# EAGLE board hvprog_05 (EAGLE 4.11)
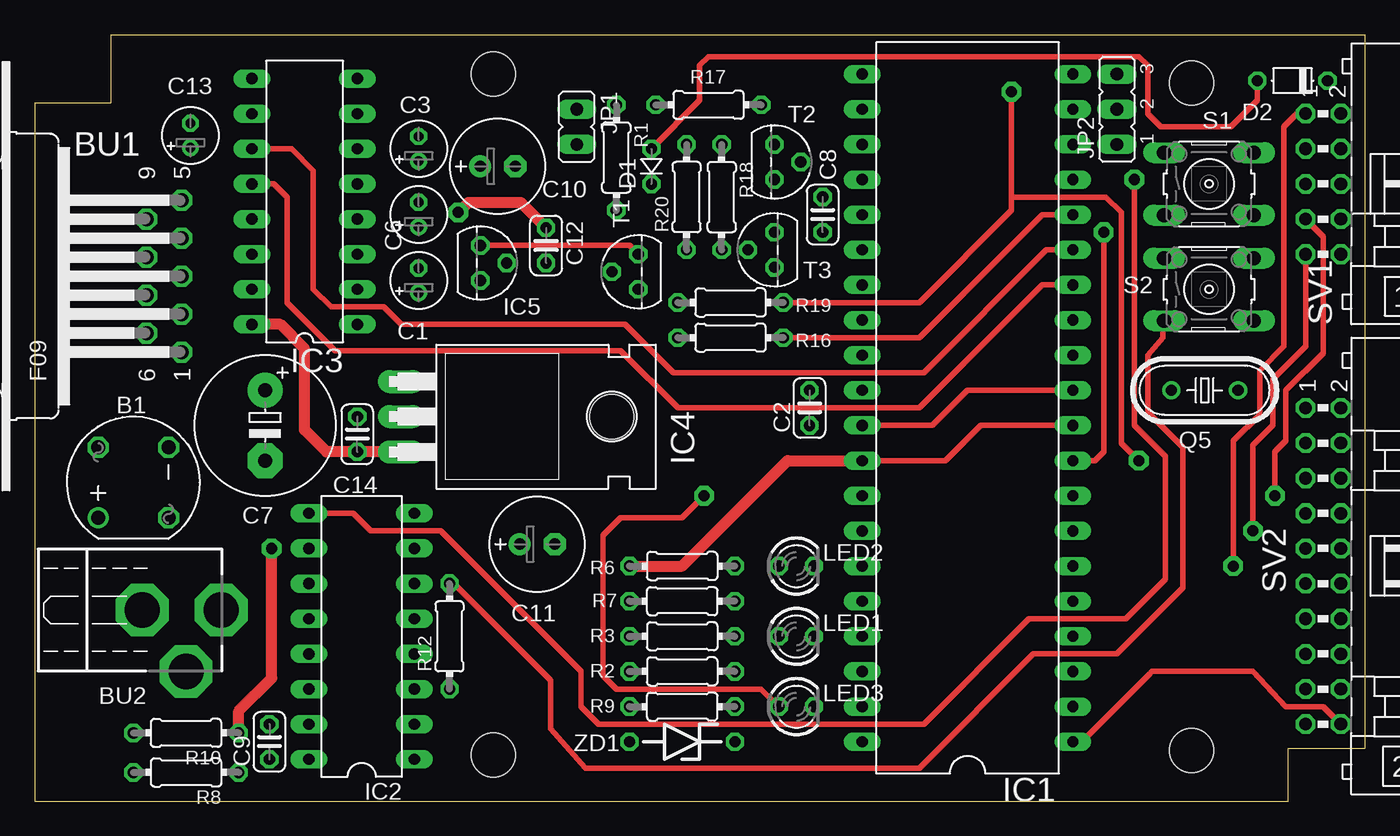
[diagram p0: board, top side]
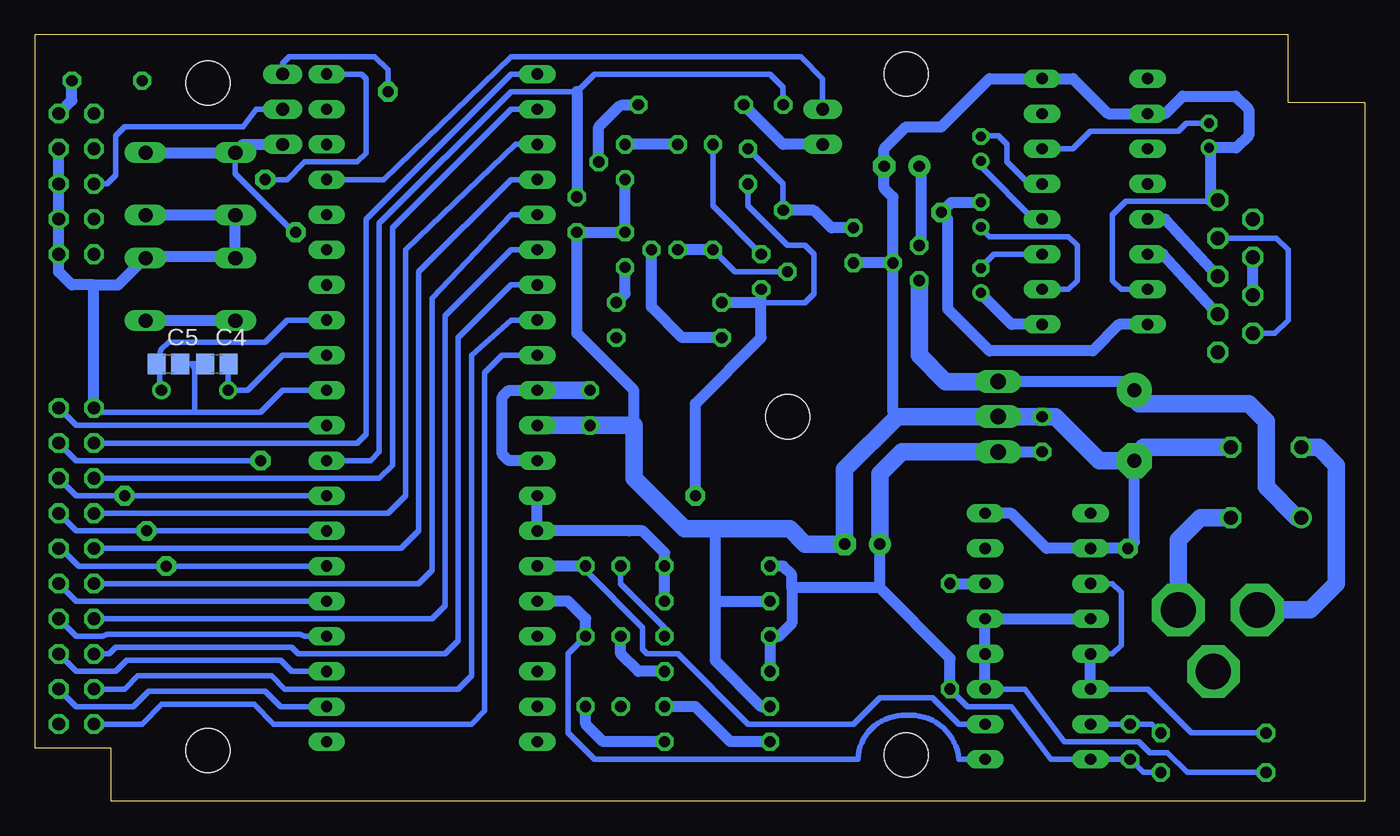
[diagram p1: board, bottom side, seen from below]

Size 96.2 x 55.4 mm. Coordinates in mm from the lower left corner, seen from the top.
Outline: 90.65,0 90.65,3.81 96.2,3.81 96.2,55.4 5.56,55.4 5.56,50.48 0,50.48 0,0 90.65,0
Copper layers (1*16): Top 0.035mm / dielectric 1.5mm / Bottom 0.035mm
Design rules "default": minimum track width 10mil, minimum drill 24mil, track to track 8mil, track to pad 8mil, pad to pad 8mil, via to via 8mil, smd to smd 8mil, copper to edge 40mil, drill to drill 8mil, minimum pad ring 10mil, minimum via ring 8mil, stop-mask expansion 4mil, vias tented up to drill 0mil, thermal gap 10mil
Holes 3.2 mm at 33.18,52.55 33.18,3.33 83.66,3.65 83.66,51.91 41.75,27.78

## Footprints (pad centres in the part's own frame; a part is rotated, then mirrored left to right if it is on the bottom)
RB1A = drill 1.016 round: + -2.54,2.54 | drill 1.016 octagon: - 2.54,-2.54; AC1 2.54,2.54; AC2 -2.54,-2.54
SUBD-F9 = drill 1.016 octagon: 1 -5.486,-10.16; 2 -2.743,-10.16; 3 0,-10.16; 4 2.743,-10.16; 5 5.486,-10.16; 6 -4.115,-7.62; 7 -1.372,-7.62; 8 1.372,-7.62; 9 4.115,-7.62
HEBW21 = drill 2.54 pad 3.81 octagon: P$R 0,3.175; P$RS 4.445,0.635; P$S 0,-2.54
E1,8-4 = drill 0.711 pad 1.168 round: + -0.889,0 | drill 0.711 pad 1.168 octagon: - 0.889,0
C025-024X044 = drill 0.813 octagon: 1 -1.27,0; 2 1.27,0
C0805 = smd 1.3 x 1.5: 1 -0.85,0; 2 0.85,0
E5-10,5 = drill 1.016 pad 2.54 round: + -2.54,0 | drill 1.016 pad 2.54 octagon: - 2.54,0
E2,5-7 = drill 0.813 pad 1.6 round: + -1.27,0 | drill 0.813 pad 1.6 octagon: - 1.27,0
D-2.5 = drill 0.813 octagon: A 1.27,0; C -1.27,0
D-5 = drill 0.813 octagon: A 2.54,0; C -2.54,0
DIL40 = drill 0.813 long: 1 -24.13,-7.62; 2 -21.59,-7.62; 3 -19.05,-7.62; 4 -16.51,-7.62; 5 -13.97,-7.62; 6 -11.43,-7.62; 7 -8.89,-7.62; 8 -6.35,-7.62; 9 -3.81,-7.62; 10 -1.27,-7.62; 11 1.27,-7.62; 12 3.81,-7.62; 13 6.35,-7.62; 14 8.89,-7.62; 15 11.43,-7.62; 16 13.97,-7.62; 17 16.51,-7.62; 18 19.05,-7.62; 19 21.59,-7.62; 20 24.13,-7.62; 21 24.13,7.62; 22 21.59,7.62; 23 19.05,7.62; 24 16.51,7.62; 25 13.97,7.62; 26 11.43,7.62; 27 8.89,7.62; 28 6.35,7.62; 29 3.81,7.62; 30 1.27,7.62; 31 -1.27,7.62; 32 -3.81,7.62; 33 -6.35,7.62; 34 -8.89,7.62; 35 -11.43,7.62; 36 -13.97,7.62; 37 -16.51,7.62; 38 -19.05,7.62; 39 -21.59,7.62; 40 -24.13,7.62
DIL16 = drill 0.813 long: 1 -8.89,-3.81; 2 -6.35,-3.81; 3 -3.81,-3.81; 4 -1.27,-3.81; 5 1.27,-3.81; 6 3.81,-3.81; 7 6.35,-3.81; 8 8.89,-3.81; 9 8.89,3.81; 10 6.35,3.81; 11 3.81,3.81; 12 1.27,3.81; 13 -1.27,3.81; 14 -3.81,3.81; 15 -6.35,3.81; 16 -8.89,3.81
TO220H = drill 1.118 long: 1 -2.54,-10.16; 2 0,-10.16; 3 2.54,-10.16
TO92 = drill 0.813 octagon: 1 -1.27,0; 2 0,1.905; 3 1.27,0
JP1 = drill 0.914 long: 1 0,-1.27; 2 0,1.27
JP2 = drill 0.914 long: 1 -2.54,0; 2 0,0; 3 2.54,0
LED3MM = drill 0.813 octagon: A -1.27,0; K 1.27,0
HC49U-V = drill 0.813 round: 1 -2.413,0; 2 2.413,0
0204/7 = drill 0.813 octagon: 1 -3.81,0; 2 3.81,0
B3F-10XX = drill 1.016 long: 1 -3.251,2.261; 2 3.251,2.261; 3 -3.251,-2.261; 4 3.251,-2.261
ML10L = drill 0.914 octagon: 1 -5.08,-1.27; 2 -5.08,1.27; 3 -2.54,-1.27; 4 -2.54,1.27; 5 0,-1.27; 6 0,1.27; 7 2.54,-1.27; 8 2.54,1.27; 9 5.08,-1.27; 10 5.08,1.27
ML20L = drill 0.914 octagon: 1 -11.43,-1.27; 2 -11.43,1.27; 3 -8.89,-1.27; 4 -8.89,1.27; 5 -6.35,-1.27; 6 -6.35,1.27; 7 -3.81,-1.27; 8 -3.81,1.27; 9 -1.27,-1.27; 10 -1.27,1.27; 11 1.27,-1.27; 12 1.27,1.27; 13 3.81,-1.27; 14 3.81,1.27; 15 6.35,-1.27; 16 6.35,1.27; 17 8.89,-1.27; 18 8.89,1.27; 19 11.43,-1.27; 20 11.43,1.27
TO92' = drill 0.813 octagon: 1 1.27,0; 2 0,1.905; 3 -1.27,0
ZDIO-7.5 = drill 0.813 octagon: A 3.81,0; C -3.81,0

## Placement (x,y rotation side)
B1  [RB1A]  7.14,23.02 90 top
BU1  SUB-BU09GW  [SUBD-F9]  0.48,37.94 90 top
BU2  HEBW21  [HEBW21]  10.32,13.81 270 top
C1  10µ  [E1,8-4]  27.78,37.62 90 top
C2  100n  [C025-024X044]  56.04,28.42 90 top
C3  10µ  [E1,8-4]  27.78,47.15 90 top
C4  33p  [C0805]  83.03,31.59 0 bottom
C5  33p  [C0805]  86.52,31.59 180 bottom
C6  10µ  [E1,8-4]  27.78,42.39 90 top
C7  470µ 35V  [E5-10,5]  16.67,27.15 270 top
C8  100n  [C025-024X044]  56.99,42.39 90 top
C9  100n  [C025-024X044]  16.99,4.29 90 top
C10  100µ 16V  [E2,5-7]  33.5,45.88 0 top
C11  470µ / 10V  [E2,5-7]  36.35,18.57 0 top
C12  100n  [C025-024X044]  36.99,40.16 270 top
C13  10µ  [E1,8-4]  11.27,48.1 90 top
C14  100n  [C025-024X044]  23.34,26.51 90 top
D1  SB130  [D-2.5]  44.61,45.88 90 top
D2  SB130  [D-5]  90.96,52.07 180 top
IC1  MEGA8535-P  [DIL40]  67.47,28.42 90 top
IC2  74HC165N  [DIL16]  23.65,11.91 90 top
IC3  MAX232  [DIL16]  19.53,43.34 90 top
IC4  7805  [TO220H]  36.67,27.78 270 top
IC5  78L12Z  [TO92]  32.23,38.89 270 top
JP1  [JP1]  39.21,48.74 180 top
JP2  [JP2]  78.26,50.01 90 top
LED1  red  [LED3MM]  55.09,11.91 0 top
LED2  green  [LED3MM]  55.09,16.99 0 top
LED3  yellow  [LED3MM]  55.09,6.83 0 top
Q5  7,3728MHz  [HC49U-V]  84.61,29.69 180 top
R1  10k  [0204/7]  42.07,46.51 270 top
R2  1k5  [0204/7]  46.83,9.37 180 top
R3  1k5  [0204/7]  46.83,11.91 180 top
R6  36k  [0204/7]  46.83,16.99 180 top
R7  150k  [0204/7]  46.83,14.45 0 top
R8  10k  [0204/7]  10.95,2.06 180 top
R9  220  [0204/7]  46.83,6.83 0 top
R10  10k  [0204/7]  10.95,4.92 180 top
R12  47k  [0204/7]  30,11.91 90 top
R16  10k  [0204/7]  50.32,33.5 180 top
R17  10k  [0204/7]  48.74,50.32 180 top
R18  10k  [0204/7]  49.69,43.66 270 top
R19  1k  [0204/7]  50.32,36.04 180 top
R20  10k  [0204/7]  47.15,43.66 90 top
S1  [B3F-10XX]  84.93,44.61 0 top
S2  [B3F-10XX]  84.93,36.99 0 top
SV1  [ML10L]  93.19,44.61 270 top
SV2  [ML20L]  93.19,16.99 270 top
T1  BC557  [TO92']  43.66,38.26 90 top
T2  BC547B  [TO92']  53.5,46.2 270 top
T3  BC547B  [TO92']  53.5,39.85 90 top
ZD1  6V8  [ZDIO-7.5]  46.83,4.29 180 top

## Library data of the parts
B1 = rectifier
BU1 BU2 = mikrocontroller-projekte
C1-C6 C8 C9 C14 R1-R3 R6-R10 R12 R16-R20 = rcl
C7 C10-C13 IC4 IC5 LED3 = rc-elektronik
D1 D2 ZD1 = diode
IC1 = avr
IC2 = 74xx-eu
IC3 = maxim
JP1 JP2 = jumper
LED1 LED2 = led
Q5 = crystal
S1 S2 = switch-omron
SV1 SV2 = con-harting-ml
T1 = transistor-pnp
T2 T3 = transistor-npn

## Nets
+5V: C2.2 C6.- C9.1 C11.+ C12.1 C14.1 D1.A D2.A IC1.10 IC1.30 IC1.32 IC2.16 IC3.16 IC4.3 R1.2 R2.2 R3.2 R6.2 R8.1 R12.1 SV2.2
+12V: C10.+ IC5.1 R20.2 T1.1
GND: B1.- BU1.5 C2.1 C4.1 C5.1 C7.- C8.1 C9.2 C10.- C11.- C12.2 C13.+ C14.2 IC1.11 IC1.31 IC2.8 IC2.10 IC2.15 IC3.8 IC3.10 IC3.15 IC4.2 IC5.2 R7.1 R9.1 R10.1 S1.3 S1.4 S2.1 S2.2 SV1.4 SV1.6 SV1.8 SV1.10 SV2.1 T2.1 T3.1
MISO: IC1.7 SV1.9 SV2.8
MOSI: IC1.6 SV1.1 SV2.10
N: IC1.36 IC2.1 LED1.K
N$1: C4.2 IC1.12 Q5.2
N$2: C5.2 IC1.13 Q5.1
N$3: C8.2 IC1.9 JP2.1 R1.1 S1.1 S1.2
N$4: LED1.A R2.1
N$5: LED2.A R3.1
N$6: IC1.20 IC2.9
N$7: IC2.11 IC2.13 IC2.14 R10.2
N$8: IC1.35 IC2.2 LED2.K
N$9: IC1.33 IC1.34 R6.1 R7.2
N$10: BU1.7 BU1.8
N$11: IC1.16 R16.1
N$12: IC2.3 IC2.4 IC2.5 IC2.12 R8.2
N$13: R16.2 T3.2
N$14: C1.+ IC3.1
N$15: C1.- IC3.3
N$16: C3.+ IC3.4
N$17: C3.- IC3.5
N$18: C13.- IC3.6
N$19: C6.+ IC3.2
N$20: IC2.6 R12.2 S2.3 S2.4
N$21: B1.+ C7.+ IC4.1 IC5.3
N$22: B1.AC1 BU2.P$S
N$23: B1.AC2 BU2.P$R
N$24: LED3.K ZD1.C
N$25: BU1.2 IC3.14
N$26: BU1.3 IC3.13
N$27: IC1.14 IC3.12
N$28: IC1.15 IC3.11
N$29: IC1.17 JP1.1
N$30: JP1.2 R17.2
N$31: R9.2 ZD1.A
N$32: BU1.4 BU1.6
N$33: D2.C SV1.2
N$34: D1.C LED3.A R19.2 T1.3
N$35: R17.1 T2.2
N$36: R18.1 T2.3
N$38: R18.2 R20.1 T1.2
PPC0: IC1.22 SV2.5
PPC1: IC1.23 SV2.7
PPC2: IC1.24 SV2.9
PPC3: IC1.25 SV2.11
PPC4: IC1.26 SV2.13
PPC5: IC1.27 SV2.15
PPC6: IC1.28 SV2.17
PPC7: IC1.29 SV2.19
PPD0: IC1.1 SV2.20
PPD1: IC1.2 SV2.18
PPD2: IC1.3 SV2.16
PPD3: IC1.4 SV2.14
PPD4: IC1.5 SV2.12
RESET(P): JP2.2 SV1.5
SCK: IC1.8 SV1.7 SV2.6
SWCLK: IC1.21 SV2.3
TRST: JP2.3 R19.1 SV2.4 T3.3

## Tracks (layer width: path | path; a pad name or v marks a point on that pad's centre or on a via)
+5V  (via drill 0.8 pad 1.42)
  Top 0.406: IC1.10 68.42,27.15 65.88,24.61 IC1.32 | D1.A 48.1,50.64 48.1,53.18 48.74,53.82 79.85,53.82 80.49,53.18 80.49,49.69 81.44,48.74 86.52,48.74 88.42,50.64 D2.A
  Top 0.813: IC3.16 17.78,34.45 19.53,32.7 19.53,26.83 21.11,25.24 IC4.3 | C12.1 35.15,43.27 31.37,43.27 v30.64,42.55 | R6.2 46.83,16.99 54.45,24.61 IC1.32 | IC1.32 | IC4.3 | v30.64,42.55 | v30.64,42.55
  Bottom 0.406: R12.1 28.73,6.83 25.56,6.83 22.7,3.02 IC2.16 C9.1 16.03,2.06 R8.1 | IC1.10 93.19,27.15 SV2.2 | R1.2 42.07,44.61 D1.A
  Bottom 0.813: R2.2 R3.2 42.39,11.91 41.43,12.86 41.43,15.4 | 35.08,15.4 C11.+ | 35.08,15.4 41.43,15.4 | 41.43,15.4 41.43,16.35 42.07,16.99 R6.2 | R12.1 30,10.32 35.08,15.4 | C12.1 38.58,41.43 39.85,42.7 R1.2 | IC3.16 15.56,34.45 17.78,34.45 19.68,32.54 27.15,32.54 30.16,35.56 30.16,42.07 v30.64,42.55 | IC1.30 61.91,29.69 62.39,29.21 62.39,25.08 61.91,24.61 60.01,24.61 59.85,24.45 IC1.32 | IC4.3 26.67,25.24 | IC4.3 | C14.1 | IC4.3 C14.1 | v30.64,42.55 | C6.- 29.91,43.27 v30.64,42.55
  Bottom 1.27: IC1.30 C2.2 | IC4.3 33.5,25.24 35.08,23.65 C11.+
+12V
  Top 0.406: T1.1 43.02,40.16 IC5.1 | IC5.1
  Bottom 0.406: T1.1 47.15,43.02 R20.2
  Bottom 0.813: 32.07,40.01 | IC5.1 32.07,40.01 | C10.+ 32.07,45.72 32.07,40.01
GND  (via drill 0.8 pad 1.42)
  Top 0.406: IC1.11 67.47,29.69 64.93,27.15 IC1.31
  Top 0.813: R10.1 14.76,6.51 17.14,8.89 v17.14,18.26
  Bottom 0.406: S2.2 88.06,39.37 | 81.72,39.25 81.68,39.29 | 81.72,39.25 81.76,39.21 81.91,39.37 | 81.72,39.25 S2.1 | IC1.11 78.26,29.69 79.85,28.1 84.61,28.1 | R10.1 15.4,5.56 C9.2 IC2.15 | 84.61,28.1 91.6,28.1 SV2.1 | C4.1 C5.1 84.93,31.59 84.61,31.27 84.61,28.1 | IC3.15 17.62,36.99 18.26,37.62 18.26,42.39 17.3,43.34 11.27,43.34 11.18,43.43 BU1.5 | C13.+ 11.27,47.15 11.18,47.06 | 16.03,24.92 16.03,25.56 | 33.81,27.78 34.13,28.1
  Bottom 0.813: T2.1 T3.1 C8.1 56.99,33.81 52.86,29.69 52.86,26.99 | SV1.4 SV1.6 SV1.8 SV1.10 94.46,38.26 93.5,37.31 91.92,37.31 | 81.68,39.29 S1.3 81.64,42.35 | 88.06,39.37 81.91,39.37 | R9.1 43.66,6.83 46.99,10.16 46.99,14.45 | 11.18,47.06 11.18,43.43 | C13.+ 9.3,47.21 8.41,48.1 8.41,50.01 9.37,50.96 13.18,50.96 14.45,49.69 IC3.10 18.57,49.69 21.11,52.23 IC3.8 27.15,52.23 30.64,48.74 33.18,48.74 34.77,47.15 C10.- 34.77,44.29 34.13,43.66 IC5.2 | 16.03,24.92 16.35,24.29 C7.- | IC2.8 25.56,20.8 23.02,18.26 IC2.10 v17.14,18.26 | IC5.2 C12.2 | 34.13,28.1 IC5.2 | 42.86,14.45 R7.1 | 46.99,14.45 42.86,14.45 | 42.86,14.45 | 46.99,19.68 46.99,14.45 | 81.64,42.35 S1.4 | 81.64,42.35 81.6,42.39 | S2.2 88.23,39.25 90.17,37.31 91.92,37.31 | SV2.1 91.92,37.31 | v17.14,18.26 | C7.- | v17.14,18.26 16.67,18.73 C7.-
  Bottom 1.27: C2.1 IC1.31 | 16.03,25.56 B1.- | C7.- 19.21,24.61 22.38,27.78 C14.2 IC4.2 33.81,27.78 37.62,23.97 C11.- 40.48,18.57 41.59,19.68 46.99,19.68 49.21,19.68 52.86,23.34 52.86,26.99 52.86,27.15 C2.1 | C2.1
MISO  (via drill 0.8 pad 1.42)
  Top 0.406: SV1.9 91.92,32.86 89.53,30.48 89.53,27.15 88.11,25.72 v88.11,19.53
  Bottom 0.406: IC1.7 | IC1.7 v88.11,19.53 93.19,19.53 SV2.8
MOSI  (via drill 0.8 pad 1.42)
  Top 0.406: SV1.1 91.28,49.69 90.33,48.74 90.33,32.86 88.58,31.11 88.58,27.94 86.68,26.04 v86.68,16.99
  Bottom 0.406: IC1.6 | IC1.6 88.26,16.99 | SV2.10 94.3,18.26 93.03,16.99 88.26,16.99 | 88.26,16.99 v86.68,16.99
N
  Bottom 0.406: 56.36,11.59 LED1.K 57.63,10.64 57.63,4.92 55.72,3.02 36.67,3.02 arc90 33.18,6.19 arc90 29.37,3.02 IC2.1
  Bottom 0.813: IC1.36 57.63,14.45 56.36,13.18 LED1.K
N$1
  Bottom 0.406: IC1.12 78.26,32.23 80.8,29.69 Q5.2 82.2,31.46 82.07,31.59 C4.2
N$2
  Bottom 0.406: IC1.13 77.95,34.77 79.53,33.18 86.52,33.18 87.05,32.65 C5.2 87.15,31.59 87.15,29.69 Q5.1
N$3  (via drill 0.8 pad 1.42)
  Top 0.406: v77.31,41.12 77.31,25.24 76.68,24.61 IC1.9
  Bottom 0.406: IC1.9 71.91,24.61 71.28,25.24 71.28,41.75 61.75,51.28 56.99,51.28 55.72,52.55 43.02,52.55 42.07,51.59 R1.1 | 81.76,46.83 81.72,46.87 S1.1 81.68,45.33 77.47,41.12 v77.31,41.12 | 88.11,46.83 88.14,46.87 S1.2
  Bottom 0.813: JP2.1 81.12,47.47 81.72,46.87 | 81.76,46.83 88.11,46.83 | 56.99,51.28 C8.2
N$4
  Bottom 0.813: LED1.A 53.82,10.64 52.55,9.37 R2.1
N$5
  Bottom 0.406: LED2.A 53.82,15.72 50.64,12.54 R3.1
N$6  (via drill 0.8 pad 1.42)
  Top 0.406: v79.53,44.93 79.53,27.15 81.76,24.92 81.76,23.97 81.76,22.7 81.76,16.03 78.9,13.18 71.91,13.18 64.29,5.56 40.8,5.56 39.53,6.83 39.53,9.37 29.37,19.53 24.29,19.53 23.02,20.8 IC2.9
  Bottom 0.406: IC1.20 72.55,52.55 72.23,52.23 72.23,46.83 72.87,46.2 76.68,46.2 77.95,44.93 v79.53,44.93
N$7
  Bottom 0.406: R10.2 12.54,4.92 15.72,8.1 IC2.14 | IC2.11 18.26,15.72 17.62,15.08 17.62,11.27 18.26,10.64 IC2.13
  Bottom 0.813: IC2.14 IC2.13
N$8
  Bottom 0.406: LED2.K 56.36,16.67 52.23,12.54 52.23,10.95 51.91,10.64 49.69,10.64 44.61,5.56 36.99,5.56 35.08,7.46 31.27,7.46 29.37,5.56 IC2.2
  Bottom 0.813: LED2.K IC1.35
N$9
  Bottom 0.406: R6.1 50.96,16.99
  Bottom 0.813: R7.2 R6.1 50.64,17.94 52.23,19.53 53.18,19.53 IC1.34 IC1.33
N$10
  Bottom 0.813: BU1.7 BU1.8
N$11
  Top 0.406: R16.1 63.98,33.5 72.87,42.39 IC1.16
N$12
  Bottom 0.406: R8.2 12.86,2.06 14.29,3.49 15.56,3.49 16.35,4.29 21.75,4.29 24.61,8.1 IC2.3
  Bottom 0.813: IC2.3 IC2.4 IC2.5 IC2.12
N$13
  Bottom 0.813: R16.2 49.37,33.5 51.59,35.72 T3.2
N$14
  Bottom 0.406: 27.78,36.67 C1.+
  Bottom 0.813: IC3.1 25.56,34.45 27.78,36.67
N$15
  Bottom 0.406: C1.- 27.78,38.58 26.83,39.53 IC3.3
N$16
  Bottom 0.406: C3.+ 27.78,45.88 23.97,42.07 IC3.4
N$17
  Bottom 0.406: IC3.5 24.29,44.61 25.88,46.2 25.88,47.47 26.51,48.1 27.46,48.1 27.53,48.04 C3.-
N$18
  Bottom 0.406: C13.- 12.92,48.99 13.49,48.42 19.84,48.42 21.11,47.15 IC3.6
N$19
  Bottom 0.406: IC3.2 21.43,36.99 20.8,37.62 20.8,40.16 21.43,40.8 27.15,40.8 27.78,41.43 C6.+
N$20
  Top 0.406: R12.2 30,16.03 37.31,8.73 37.31,5.24 39.85,2.38 63.98,2.38 72.23,10.64 78.26,10.64 83.03,15.4 83.03,25.56 80.49,28.1 80.49,32.23 81.6,33.5 81.6,34.77
  Top 0.813: 81.6,34.77 81.64,34.73 S2.3
  Bottom 0.813: R12.2 IC2.6 | S2.4 88.14,34.73 88.11,34.77 88.07,34.73 S2.3
N$21
  Bottom 0.406: B1.+ 4.92,20.48 | C7.+ 16.67,29.37 16.35,29.05 16.35,28.73
  Bottom 0.813: C7.+ 17.3,30.32 IC4.1
  Bottom 1.27: 4.92,20.48 7.14,22.7 7.14,27.46 8.41,28.73 16.35,28.73 | IC4.1 30.32,30.32 32.23,32.23 IC5.3
N$22
  Bottom 0.406: BU2.P$S 7.78,13.49 7.46,13.81
  Bottom 1.27: B1.AC1 3.33,25.56 2.06,24.29 2.06,15.72 3.97,13.81 7.46,13.81
N$23
  Bottom 1.27: B1.AC2 11.91,20.48 13.49,18.89 BU2.P$R
N$24
  Bottom 0.813: ZD1.C 55.09,4.29 56.36,5.56 LED3.K | LED3.K
N$25
  Bottom 0.813: BU1.2 14.6,39.53 15.56,39.53 IC3.14
N$26
  Bottom 0.813: BU1.3 14.45,42.07 15.56,42.07 IC3.13
N$27
  Top 0.406: IC1.14 72.87,37.31 63.98,28.42 46.51,28.42 42.39,32.54 21.75,32.54 18.26,36.04 18.26,43.66 17.3,44.61 IC3.12
N$28
  Top 0.406: IC1.15 73.18,39.85 64.29,30.96 46.2,30.96 42.7,34.45 26.51,34.45 25.24,35.72 21.43,35.72 20.16,36.99 20.16,45.56 18.57,47.15 IC3.11
N$29
  Bottom 0.406: IC1.17 70.96,44.93 61.75,53.82 40.8,53.82 39.21,52.23 JP1.1
N$30
  Bottom 0.813: JP1.2 42.07,47.47 R17.2
N$31
  Bottom 0.813: ZD1.A 45.88,4.29 48.42,6.83 R9.2
N$32
  Bottom 0.406: BU1.4 6.39,40.68 5.56,39.85 5.56,34.77 6.51,33.81 7.94,33.81 7.95,33.83 BU1.6
N$33
  Bottom 0.813: D2.C 93.5,50.64 SV1.2
N$34  (via drill 0.8 pad 1.42)
  Top 0.406: v48.42,22.07 46.83,20.48 42.39,20.48 41.12,19.21 41.12,9.05 42.07,8.1 52.55,8.1 LED3.A
  Bottom 0.406: D1.C 44.61,43.02 41.75,40.16 40.48,40.16 39.85,39.53 39.85,36.67 40.48,36.04 43.66,36.04
  Bottom 0.813: 43.66,36.04 43.66,33.5 48.42,28.73 v48.42,22.07 | 43.66,36.04 T1.3 | 43.66,36.04 R19.2
N$35
  Bottom 0.406: 53.89,50.25 arc45 53.71,50.32
  Bottom 0.813: 53.71,50.32 R17.1 | 53.89,50.25 55.4,48.74 T2.2
N$36
  Bottom 0.813: R18.1 T2.3
N$38
  Bottom 0.406: T1.2 45.56,38.26 R20.1
  Bottom 0.813: R20.1 R18.2
PPC0
  Bottom 0.406: IC1.22 61.75,50.01 70.33,41.43 70.33,24.29 71.28,23.34 SV2.5
PPC1
  Bottom 0.406: IC1.23 61.44,47.47 69.37,39.85 69.37,22.07 70.64,20.8 SV2.7
PPC2
  Bottom 0.406: IC1.24 61.75,44.93 68.42,38.26 68.42,19.53 69.69,18.26 SV2.9
PPC3
  Bottom 0.406: IC1.25 61.75,42.39 67.47,36.35 67.47,16.67 68.42,15.72 SV2.11
PPC4
  Bottom 0.406: IC1.26 61.75,39.85 66.52,35.08 66.52,14.13 67.47,13.18 SV2.13
PPC5
  Bottom 0.406: IC1.27 61.75,37.31 65.56,33.5 65.56,11.59 66.52,10.64 77.15,10.64 77.63,11.11 90.33,11.11 90.8,10.64 SV2.15
PPC6
  Bottom 0.406: IC1.28 61.75,34.77 64.61,32.23 64.61,9.05 65.56,8.1 78.1,8.1 79.06,9.05 88.74,9.05 89.69,8.1 SV2.17
PPC7
  Bottom 0.406: IC1.29 62.39,32.23 63.66,30.96 63.66,6.51 64.61,5.56 78.9,5.56 80.33,6.99 86.99,6.99 88.42,5.56 SV2.19
PPD0
  Top 0.406: SV2.20 94.61,5.4 | SV2.20 | SV2.20 93.19,6.83 90.49,6.83 88.11,9.37 80.8,9.37 80.64,9.21 75.72,4.29 75.25,4.29 75.09,4.45 IC1.1
PPD1
  Bottom 0.406: SV2.18 93.19,6.83 89.06,6.83 87.95,7.94 79.53,7.94 78.42,6.83 IC1.2
PPD2
  Bottom 0.406: SV2.16 93.19,9.37 90.33,9.37 89.53,10.16 78.42,10.16 77.63,9.37 IC1.3
PPD3
  Bottom 0.406: SV2.14 93.19,11.91 91.28,11.91 90.96,12.06 76.99,12.06 76.68,11.91 IC1.4
PPD4
  Bottom 0.406: IC1.5 93.19,14.45 SV2.12
RESET(P)
  Bottom 0.406: JP2.2 80.17,50.01 81.12,48.74 89.69,48.74 90.33,48.1 90.33,45.24 90.96,44.61 SV1.5
SCK  (via drill 0.8 pad 1.42)
  Top 0.406: SV1.7 93.19,40.8 93.19,32.38 90.49,29.69 90.49,26.04 89.69,25.24 v89.69,22.07
  Bottom 0.406: SV2.6 | SV2.6 93.19,22.07 v89.69,22.07 90.49,22.07 IC1.8
SWCLK
  Bottom 0.406: IC1.21 61.75,52.55 72.23,42.07 72.23,26.51 72.87,25.88 SV2.3
TRST  (via drill 0.8 pad 1.42)
  Top 0.406: R19.1 63.98,36.04 70.64,42.7 70.64,43.66 | v79.85,24.61 78.58,25.88 78.58,42.55 77.47,43.66 70.64,43.66 | 70.64,43.66 v70.64,51.28
  Bottom 0.406: SV2.4 93.19,24.61 v79.85,24.61 | v70.64,51.28 70.64,52.86 71.6,53.82 77.79,53.82 78.26,53.34 JP2.3
  Bottom 0.813: T3.3 53.5,36.67 R19.1